# EAGLE board untitled (EAGLE 9.6.2)
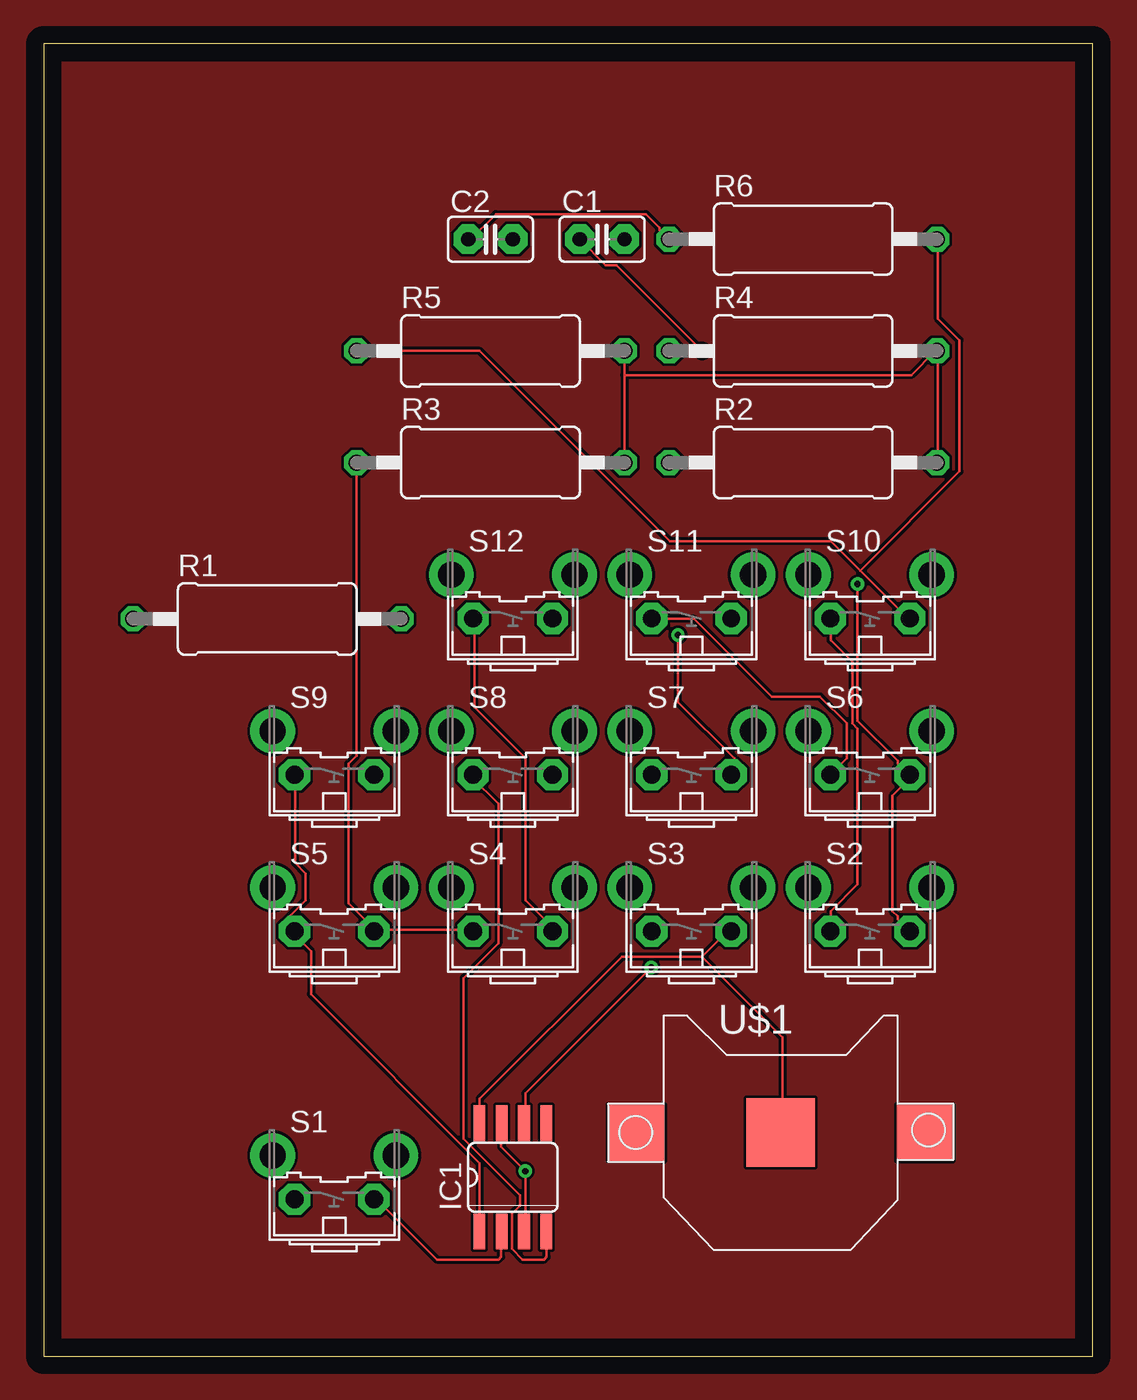
[diagram p0: board, top side]
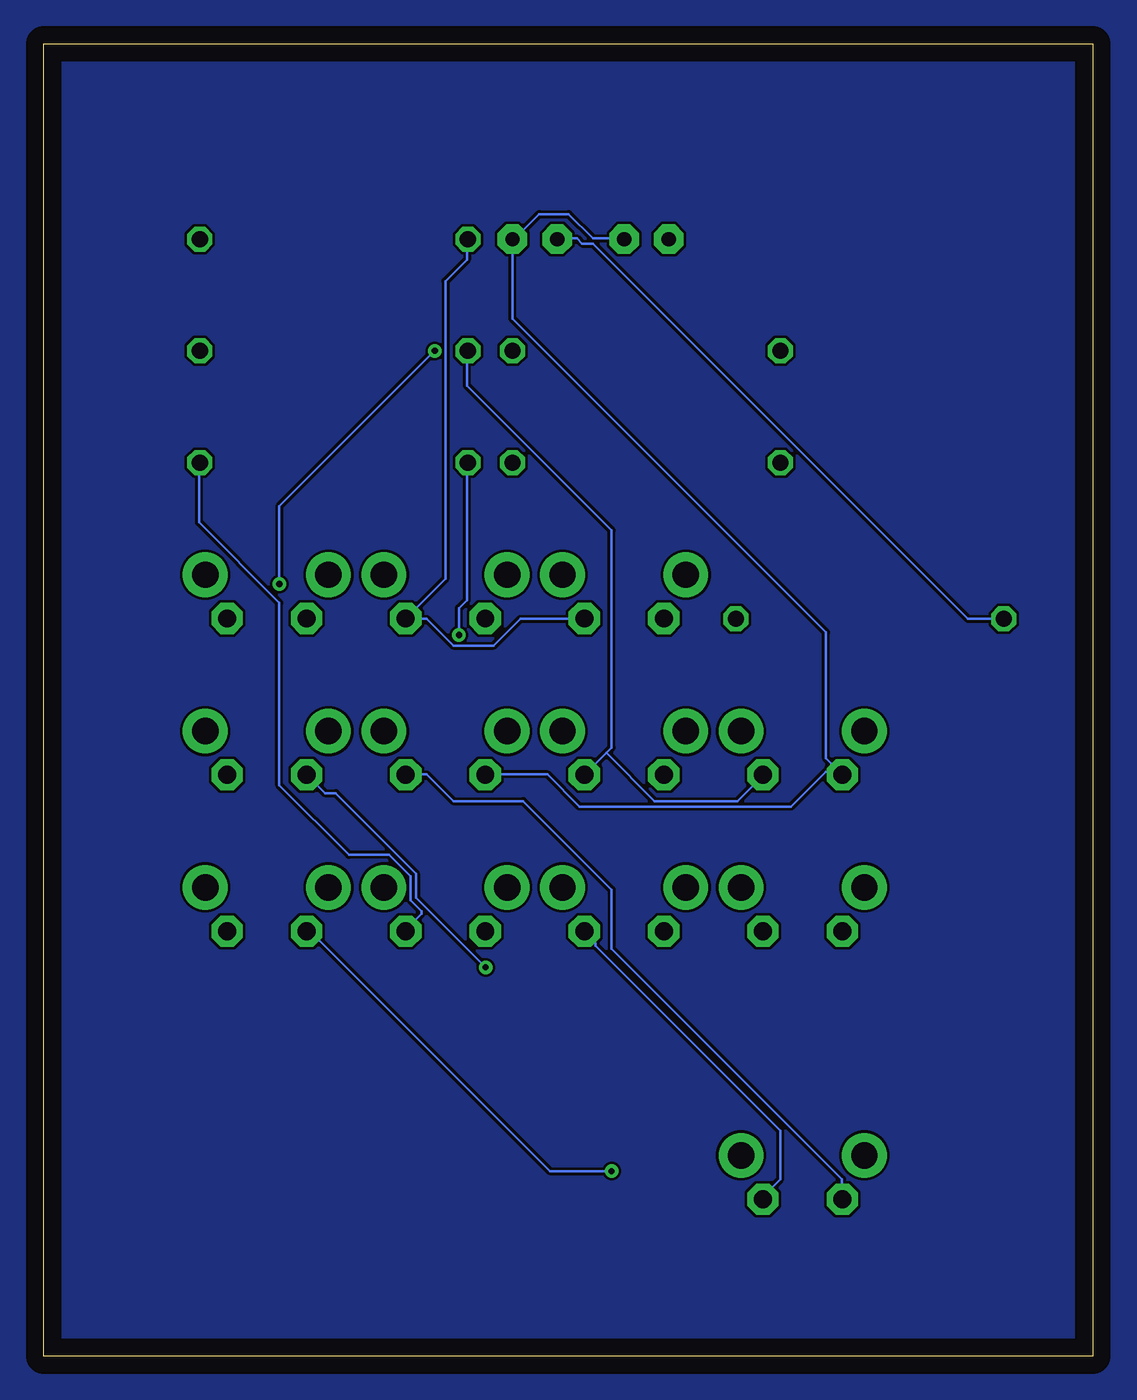
[diagram p1: board, bottom side, seen from below]

Size 59.67 x 74.6 mm. Coordinates in mm from the lower left corner, seen from the top.
Outline: 0,0 59.67,0 59.67,74.6 0,74.6 0,0
Copper layers (1*16): Top 0.035mm / dielectric 1.5mm / Bottom 0.035mm
Design rules "default": minimum track width 6mil, minimum drill 0.35mm, track to track 6mil, track to pad 6mil, pad to pad 6mil, via to via 6mil, smd to smd 6mil, copper to edge 40mil, drill to drill 6mil, minimum pad ring 10mil, minimum via ring 8mil, stop-mask expansion 4mil, vias tented up to drill 0mil, thermal gap 10mil

## Footprints (pad centres in the part's own frame; a part is rotated, then mirrored left to right if it is on the bottom)
C025-025X050 = drill 0.813 pad 1.676 octagon: 1 -1.27,0; 2 1.27,0
SO08 = smd 0.66 x 2.032: 1 -1.905,-3.073; 2 -0.635,-3.073; 3 0.635,-3.073; 4 1.905,-3.073; 5 1.905,3.073; 6 0.635,3.073; 7 -0.635,3.073; 8 -1.905,3.073
0411/15 = drill 0.914 octagon: 1 -7.62,0; 2 7.62,0
B3F-31XX = drill 1.016 pad 1.778 octagon: 1 -2.261,-1.245; 2 2.261,-1.245 | drill 1.499 pad 2.54: 3 -3.505,1.245; 4 3.505,1.245
CR1220-SMD = smd 3.2 x 3.2: +$1 -8.2,0; +$2 8.2,0 | smd 3.9 x 3.9: - 0,0

## Placement (x,y rotation side)
C1  [C025-025X050]  31.75,63.5 0 top
C2  [C025-025X050]  25.4,63.5 0 top
IC1  LM555D  [SO08]  26.67,10.16 0 top
R1  [0411/15]  12.7,41.91 0 top
R2  [0411/15]  43.18,50.8 0 top
R3  [0411/15]  25.4,50.8 0 top
R4  [0411/15]  43.18,57.15 0 top
R5  [0411/15]  25.4,57.15 0 top
R6  [0411/15]  43.18,63.5 0 top
S1  [B3F-31XX]  16.51,10.16 0 top
S2  [B3F-31XX]  46.99,25.4 0 top
S3  [B3F-31XX]  36.83,25.4 0 top
S4  [B3F-31XX]  26.67,25.4 0 top
S5  [B3F-31XX]  16.51,25.4 0 top
S6  [B3F-31XX]  46.99,34.29 0 top
S7  [B3F-31XX]  36.83,34.29 0 top
S8  [B3F-31XX]  26.67,34.29 0 top
S9  [B3F-31XX]  16.51,34.29 0 top
S10  [B3F-31XX]  46.99,43.18 0 top
S11  [B3F-31XX]  36.83,43.18 0 top
S12  [B3F-31XX]  26.67,43.18 0 top
U$1  [CR1220-SMD]  41.91,12.7 0 top

## Library data of the parts
C1 C2 IC1 R1-R6 S1-S12 U$1 = adafruit

## Nets
N$1: C1.1 R1.1 S2.2 S6.2
N$2: C1.2 C2.2 IC1.1 S5.1 S7.1 S9.1
N$3: IC1.3 IC1.7 S2.1 S10.1
N$4: IC1.2 S1.2 S4.2 S12.1
N$5: IC1.6 S6.1 S11.1
N$6: R3.1 S4.1 S5.2
N$7: R2.1 S1.1 S7.2
N$8: IC1.4 S8.1
N$9: R4.1 S8.2 S9.2
N$10: IC1.8 R2.2 R3.2 R4.2 R5.2 S3.2 U$1.-
N$11: R5.1 R6.2 S10.2
N$13: C2.1 R6.1 S11.2 S12.2

## Tracks (layer width: path | path; a pad name or v marks a point on that pad's centre or on a via)
GND
  pour Top: -10.16,81.28 68.58,81.28 74.93,74.93 74.93,-2.54 67.31,-10.16 -2.54,-10.16 -8.89,-3.81 -10.16,-2.54
  pour Bottom: -8.89,80.01 66.04,80.01 72.39,73.66 72.39,-2.54 68.58,-6.35 0,-6.35 -6.35,0 -6.35,3.81 -8.89,6.35
N$1  (via drill 0.35)
  Top 0.152: S2.2 48.56,24.84 48.56,24.99 48.26,25.3 48.26,31.85 49.33,32.92 S6.2 49.17,33.07 48.56,33.68 48.56,33.83 46.28,36.12 v46.28,43.89 | v37.44,57.15 32.56,62.03 31.95,62.03 C1.1
  Bottom 0.152: R1.1 7.11,41.91 28.45,63.25 29.06,63.25 29.36,63.55 30.43,63.55 C1.1 | v46.28,43.89 46.28,48.31 v37.44,57.15
N$2
  Top 0.152: IC1.1 24.79,7.16 24.79,10.97 15.19,20.57 15.19,23.01 14.12,24.08 S5.1 14.12,24.23 13.97,24.38 13.97,24.99 14.88,25.91 14.88,27.43 14.27,28.04 14.27,32.92 S9.1
  Bottom 0.152: 33.02,63.4 31.5,64.92 29.82,64.92 28.45,63.55 26.77,63.55 C2.2 | 14.88,33.22 14.43,33.22 S9.1 14.88,33.22 | 14.88,33.22 15.19,33.22 17.17,31.24 29.21,31.24 31.04,33.07 34.54,33.07 S7.1 | 33.02,63.4 33.02,58.98 15.19,41.15 15.19,33.98 14.88,33.68 14.88,33.22 | 33.02,63.4 C1.2
N$3  (via drill 0.35)
  Top 0.152: IC1.3 27.38,7.16 v27.38,10.52 26.01,11.89 26.01,13.11 IC1.7 | S2.1 44.76,24.23 44.76,25.3 46.28,26.82 46.28,35.66 45.97,35.97 45.97,39.47 44.76,40.69 44.76,41.91 S10.1
  Bottom 0.152: v27.38,10.52 30.89,10.52 44.6,24.23 S2.1
N$4
  Top 0.152: IC1.2 26.01,7.01 26.01,5.64 25.86,5.49 22.35,5.49 18.85,8.99 S1.2 | S12.1 24.49,41.91 24.49,36.88 27.38,33.98 27.38,25.91 29.06,24.23 S4.2
  Bottom 0.152: S4.2 28.9,24.08 28.3,23.47 28.3,23.32 17.78,12.8 17.78,10.06 18.85,8.99 S1.2
N$5  (via drill 0.35)
  Top 0.152: v34.54,22.1 27.38,14.94 27.38,13.26 IC1.6 | S6.1 45.67,33.98 45.67,35.97 44.14,37.49 41.4,37.49 36.98,41.91 34.7,41.91 S11.1
  Bottom 0.152: v34.54,22.1 38.51,26.06 38.51,27.43 43.08,32 43.69,32 S6.1
N$6
  Top 0.152: R3.1 17.78,34.14 17.32,33.68 17.32,25.76 18.85,24.23 | 18.85,24.23 24.33,24.23 S4.1 | 18.85,24.23 S5.2
N$7  (via drill 0.35)
  Top 0.152: v36.07,41 36.07,37.19 39.27,33.98 39.27,33.22 S7.2
  Bottom 0.152: v36.07,41 36.07,42.52 35.61,42.98 35.61,50.75 R2.1 | S1.1 14.27,8.99 14.27,10.06 27.38,23.16 27.38,26.52 32.41,31.55 36.37,31.55 37.9,33.07 38.96,33.07 S7.2
N$8
  Top 0.152: IC1.4 28.6,7.01 28.6,5.64 28.45,5.49 27.23,5.49 26.62,6.1 26.62,8.08 27.08,8.53 27.08,9.14 23.88,12.34 23.88,21.49 25.86,23.47 25.86,31.39 24.33,32.92 S8.1
N$9
  Bottom 0.152: S8.2 27.69,34.29 | 27.69,34.29 27.38,34.59 27.38,46.94 35.61,55.17 35.61,57.15 R4.1 | 27.69,34.29 24.94,31.55 20.22,31.55 18.85,32.92 S9.2
N$10
  Top 0.152: R5.2 33.02,55.78 | 33.02,55.78 R3.2 | R2.2 50.85,50.9 50.85,57.15 R4.2 50.7,57.15 49.33,55.78 33.02,55.78 | 37.44,22.71 32.87,22.71 24.79,14.63 24.79,13.26 IC1.8 | 37.44,22.71 38.96,24.23 S3.2 | 37.44,22.71 42.01,18.14 42.01,12.8 U$1.-
  Bottom 0.152: R2.2 50.85,50.75 50.85,47.4 46.28,42.82 46.28,32.46 42.32,28.5 40.03,28.5 38.81,27.28 38.81,25.91 38.2,25.3 38.2,25.15 39.12,24.23 S3.2
N$11
  Top 0.152: R5.1 24.79,57.15 35.61,46.33 44.76,46.33 46.43,44.65 | 46.43,44.65 49.17,41.91 S10.2 | 46.43,44.65 52.07,50.29 52.07,57.76 50.85,58.98 50.85,63.4 R6.2
N$13
  Top 0.152: R6.1 35.46,63.55 35,64.01 35,64.16 34.24,64.92 25.7,64.92 24.18,63.4 C2.1
  Bottom 0.152: 38.51,41.91 38.96,41.91 S11.2 38.51,41.91 | 38.51,41.91 37.9,41.91 36.37,40.39 34.09,40.39 32.56,41.91 29.06,41.91 S12.2 | 38.51,41.91 38.51,42.52 36.83,44.2 36.83,61.11 35.61,62.33 35.61,63.4 R6.1